# Altium PCB ife18_TS_AIL_Buck.PcbDoc
Units mm, origin at the board's own origin, x right, y up, seen from the top; angles counter-clockwise.
Board outline 25 x 19.5 mm, 2 copper layers (Top Layer, Bottom Layer); 12 components, 12 nets, 42 pads, 8 vias.
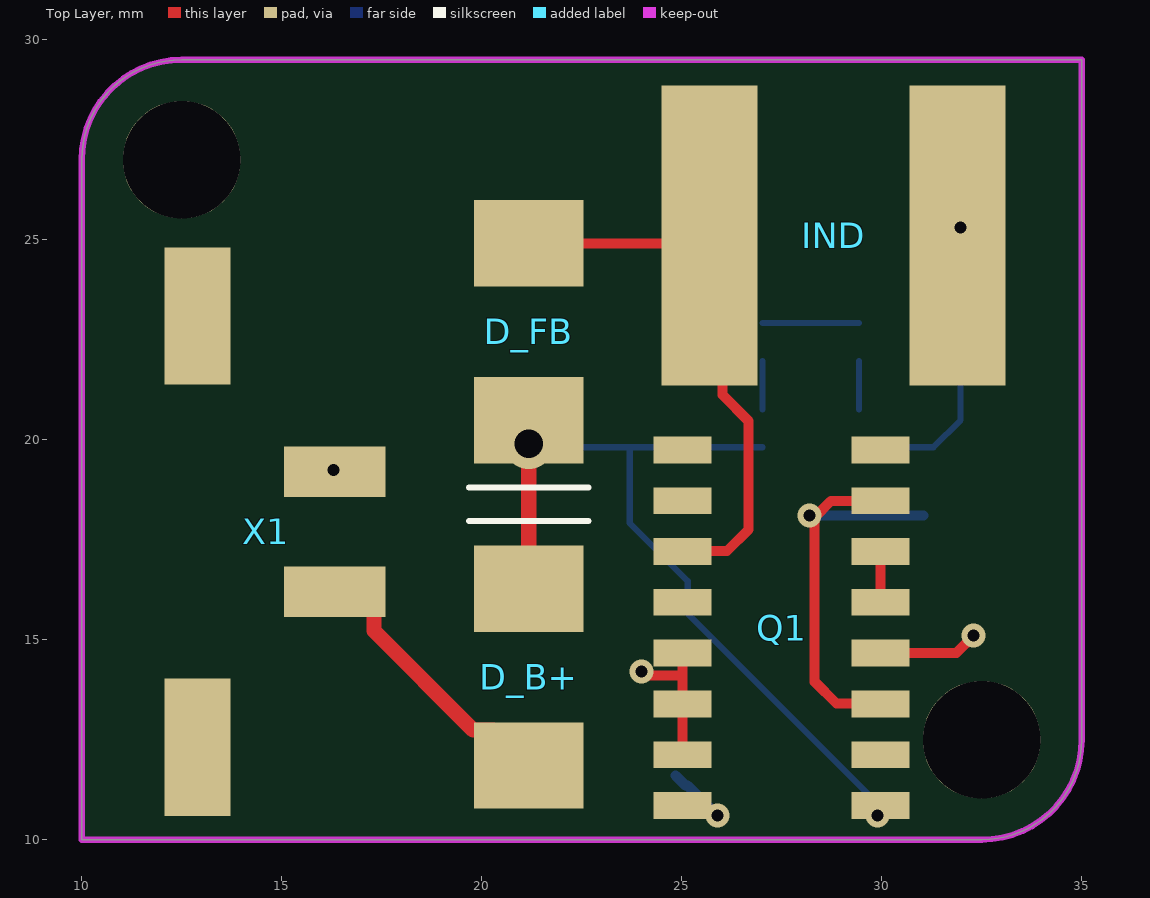
[diagram p0: Top Layer view]
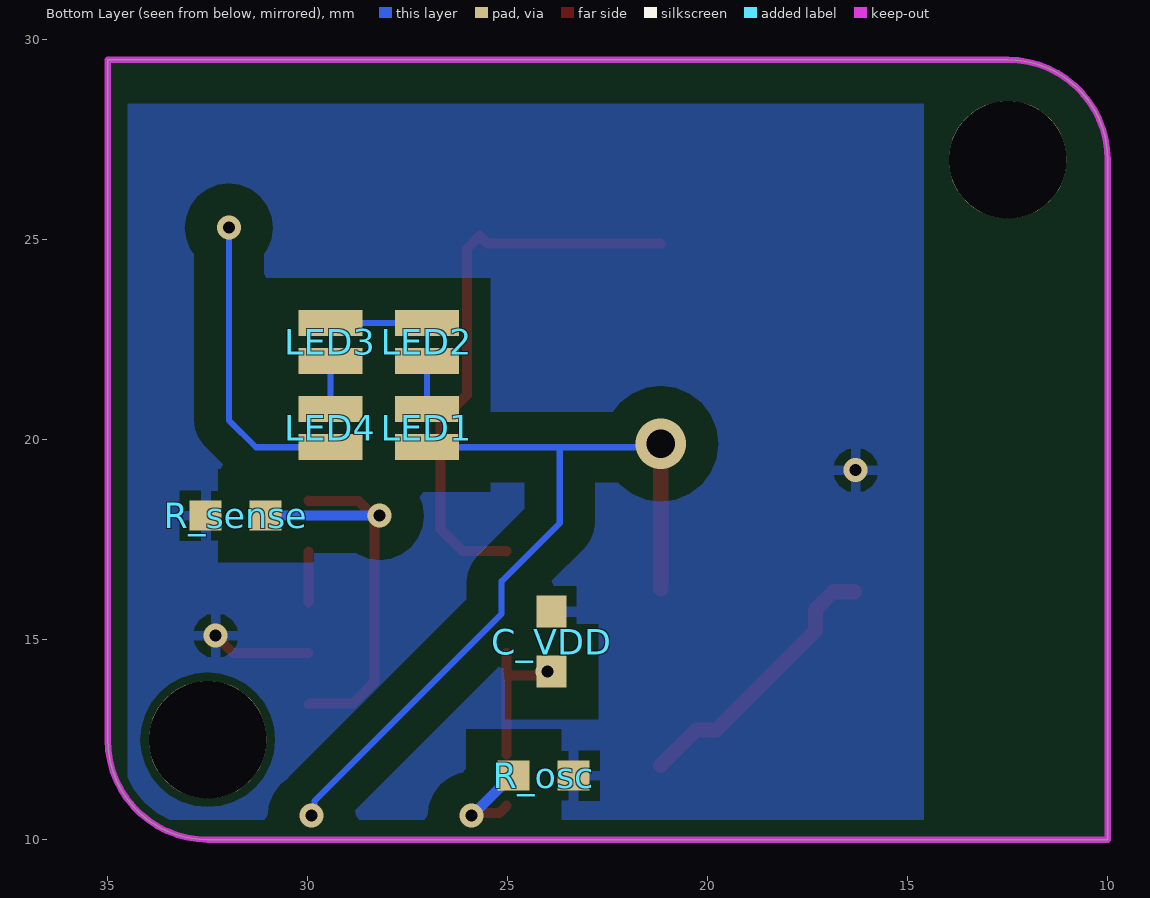
[diagram p1: Bottom Layer view, seen from below]
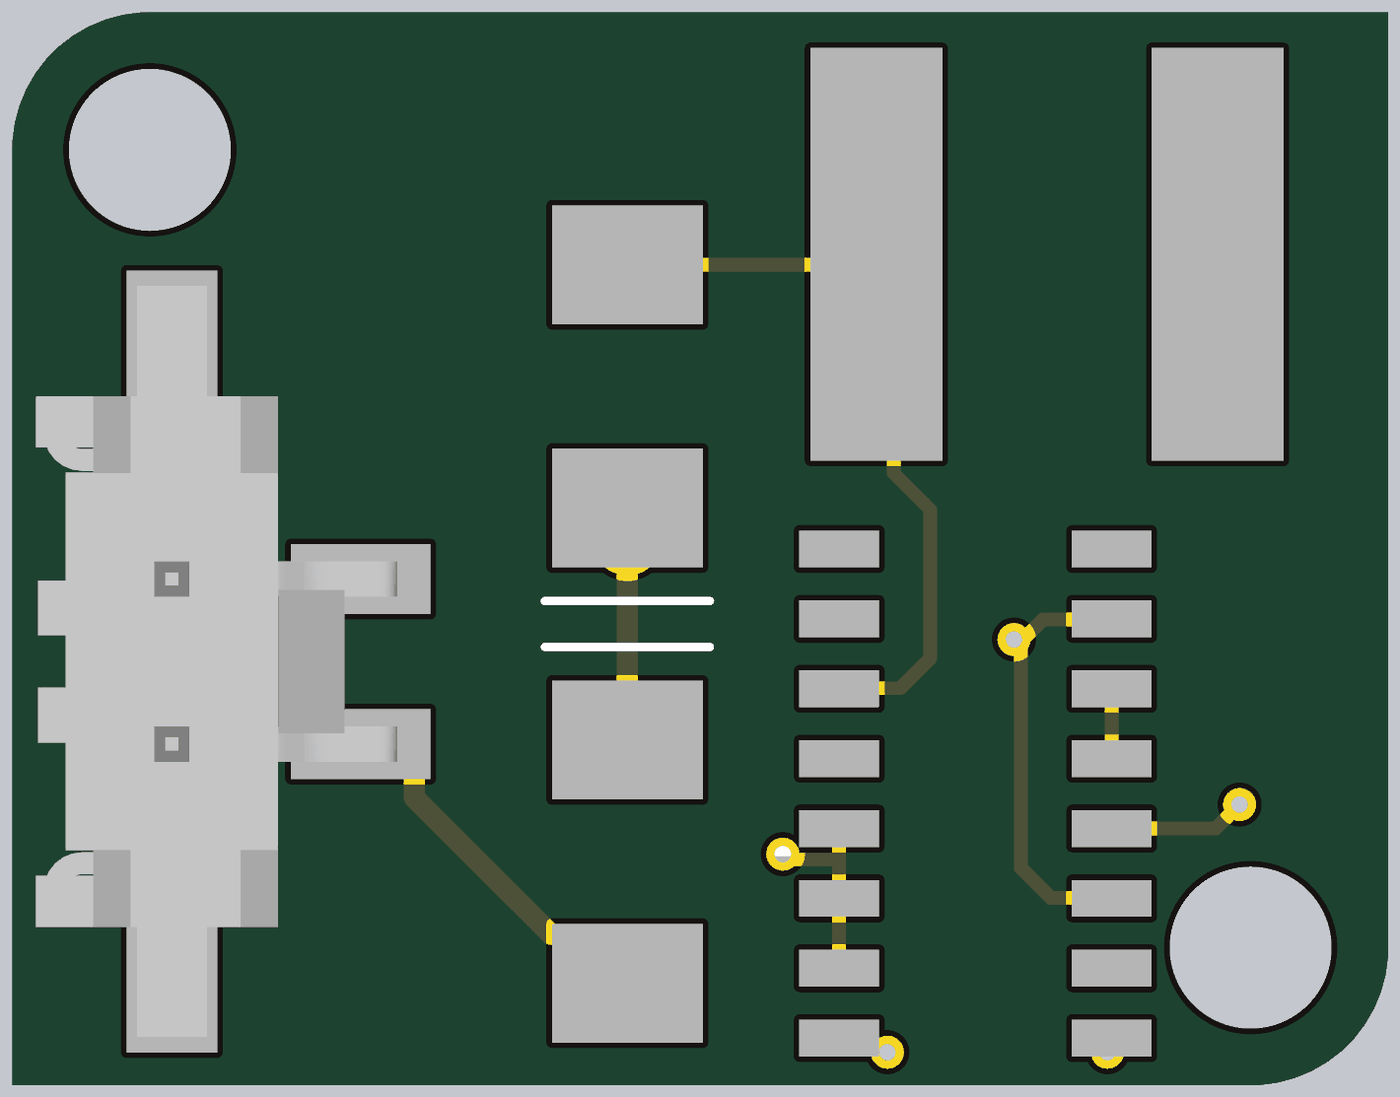
[diagram p2: 3D render of the assembled board from above, using the file's embedded part models]

## Layer stack, top to bottom
Top Solder: solder mask 0.0102, Solder Resist, Dk 3.5
Top Layer: signal copper 0.0356
Dielectric 1: dielectric 0.32, FR-4, Dk 4.8
Bottom Layer: signal copper 0.0356
Bottom Solder: solder mask 0.0102, Solder Resist, Dk 3.5

## Board outline
10,10 10,27 cw(c12.5,27) 12.5,29.5 35,29.5 35,12.5 cw(c32.5,12.5) 32.5,10

## Design rules (kind name [scope] priority, off if disabled: settings)
BoardOutlineClearance [All] p1: gap=0.2 ignorepadtopadclearanceinfootprint=FALSE
Clearance "Board Clearance" [(IsPad OR OnLayer('Keep-Out Layer'))] p1: gap=0.2 ignorepadtopadclearanceinfootprint=TRUE
Clearance [All] p2: gap=0.8 ignorepadtopadclearanceinfootprint=TRUE
PolygonConnect "Inductor Plane" [InNet('NetD_FB_A')] p1: connectstyle=Direct reliefconductorwidth=0.254 reliefentries=4 polygonreliefangle="90 Angle" airgapwidth=0.254
PolygonConnect Polygons [All] p2: connectstyle=Relief reliefconductorwidth=0.254 reliefentries=4 polygonreliefangle="90 Angle" airgapwidth=0.254
RoomDefinition ife18_TS_AIL_Buck [InComponentClass('ife18_TS_AIL_Buck')] p1: confinementstyle=ConfineIn formatcopy=TRUE lockcomponents=FALSE outline 0,0 50.8,0 50.8,40.5 0,40.5
RoutingVias [All] p1: holewidth=0.3 width=0.6 viastyle="Through Hole" minholewidth=0.3 minwidth=0.6 maxholewidth=6.3 maxwidth=10
SolderMaskExpansion [All] p1: expansion=0.102
Width [All] p1: maxlimit=0.5 minlimit=0.152 preferedwidth=0.25
30 further rules are at their usual default settings.

## Classes and differential pairs
component class ife18_TS_AIL_Buck: D_B+ D_FB IND LED1 LED2 LED3 LED4 R_sense X1

## Components (designator, comment, footprint, x,y, rotation, side; value= is the part's Value field where it differs from the comment)
C_VDD "1u" CAP-0603 23.9,14.95 r270 bottom
D_B+ "40V" SMB 21.176,14.064 r270 top
D_FB "?" SMB 21.176,22.7 r90 top
IND "2.2mH" IND-8080 28.8,25.1 r180 top
LED1 "LED XQA Red" LED_XQARED 27.018,20.287 r90 bottom
LED2 "LED XQA Red" LED_XQARED 27.018,22.446 r90 bottom
LED3 "LED XQA Red" LED_XQARED 29.431,22.446 r270 bottom
LED4 "LED XQA Red" LED_XQARED 29.431,20.287 r270 bottom
Q1 "?" SO-16 27.5,15.3 r270 top
R_osc "1M" RES-0603 24.1,11.6 r180 bottom
R_sense "2" RES-0603 31.8,18.1 r180 bottom
X1 "Molex - Micro-Fit 3.0 Series connector,  3.00mm (0.118\") pitch header, 2 positions." 43650-0224 12.9,17.7 r270 top

## Footprints (in the part's own frame and the unit in brackets; to place one, negate y for a bottom-side part, rotate by r counter-clockwise, add the part's x,y. Pads: shape width x height; smd on the part's side, far side on the other; paste and mask are expansions set on the pad)
43650-0224 [mm]
  rect 1.27x2.54 smd: P$1(1.5,3.43) P$2(-1.5,3.43)
  rect 3.43x1.65 smd: TAB1(5.39,0) TAB2(-5.39,0)
  body extent -6.82,-2.47 6.83,4.1, height 9.95
CAP-0603 [mm]
  rect 0.8x0.75 smd: 1(-0.75,0) 2(0.75,0)
  body extent -0.8,-0.4 0.8,0.42, height 0.81
IND-8080 [mm]
  rect 2.4x7.5 smd: 1(-3.1,0) 2(3.1,0)
LED_XQARED [mm]
  rect 0.65x1.6 smd: A(-0.475,0) K(0.475,0)
RES-0603 [mm]
  rect 0.8x0.75 smd: 1(-0.75,0) 2(0.75,0)
  body extent -0.8,-0.4 0.8,0.4, height 0.44
SMB [mm]
  rect 2.159x2.743 smd: A(2.21,0) K(-2.21,0)
  silkscreen extent -3.9,-1.5 -3.9,1.5, body extent -2.79,-1.97 2.8,1.97, height 2.5
SO-16 [mm]
  rect 0.67x1.45 smd: 1(-4.445,-2.475) 2(-3.175,-2.475) 3(-1.905,-2.475) 4(-0.635,-2.475) 5(0.635,-2.475) 6(1.905,-2.475) 7(3.175,-2.475) 8(4.445,-2.475) 9(4.445,2.475) 10(3.175,2.475) 11(1.905,2.475) 12(0.635,2.475) 13(-0.635,2.475) 14(-1.905,2.475) 15(-3.175,2.475) 16(-4.445,2.475)
  body extent -4.98,-3.07 4.99,3.07, height 1.78

## Part data
C_VDD: library part CAP-0603
D_B+ D_FB: library part DIODE-SMB
IND: library part IND-8080
LED1 LED2 LED3 LED4: library part LED_XQARED
Q1: library part IC-SO16_AL9901_1
R_osc R_sense: library part RES-0603
X1: library part POS2_MF43650-0224, Package=43650-0224, DeviceName=43650-0224, DeviceSetName=HEADER_POS2_?, GateName_1=G$1, LibraryName="MOLEX Micro-Fit", SymbolName_1=HEADER_POS2

## Free pads (board coordinates)
  round 2.946 hole 2.946 unplated: H1(12.5,27) H2(32.5,12.5)

## Via types
v1: diameter 0.6, hole 0.3, Top Layer to Bottom Layer, 7 vias
v2: diameter 1.27, hole 0.711, Top Layer to Bottom Layer, 1 vias

## Nets (pads, with @x,y where several pads share a name; then routed paths per layer and width w, separated by ;. In a path a pad name is that pad's centre, name@x,y a point inside that pad or via, vN(x,y) a via of type N, cw(c..) or ccw(c..) an arc to the next point about the centre after c; other vN are vias at no path point)
GND: C_VDD.1 Q1.12 R_osc.2 R_sense.1 X1.P$2 | length 2.5
  Top Layer w0.25: Q1.12 31.865,14.665 v1(32.3,15.1)
  other v1: 16.3,19.237
NetC_VDD_2: C_VDD.2 Q1.5 Q1.6 Q1.7 | length 3.6
  Top Layer w0.25: v1(24,14.2) 24.1,14.1 25.025,14.1 ; Q1.7 Q1.6 25.025,14.1 ; Q1.5 25.025,14.1
NetD_B+_A: D_B+.A X1.P$1 | length 7
  Top Layer w0.381: X1.P$1 16.861,16.2 17.306,15.755 17.306,15.224 19.787,12.743 20.287,12.743 D_B+.A
NetD_B+_K: D_B+.K D_FB.K LED1.A Q1.9 | length 21.3
  Top Layer w0.381: D_B+.K v2(21.176,19.9)
  Bottom Layer w0.152: v2(21.176,19.9) 21.264,19.812 23.7,19.812 ; LED1.A 23.7,19.812 ; v1(29.9,10.6) 29.829,10.671 29.829,10.971 25.151,15.649 25.151,16.463 23.7,17.914 23.7,19.812
NetD_FB_A: D_FB.A IND.2 Q1.3 | length 14.2
  Top Layer w0.25: D_FB.A 25.51,24.91 IND.2 26.017,24.783 26.017,21.121 26.675,20.463 26.675,17.757 26.133,17.215 25.035,17.215 Q1.3
NetIND_1: IND.1 LED4.K | length 7.6
  Bottom Layer w0.152: LED4.K 31.293,19.812 31.971,20.49 v1(31.971,25.3)
NetLED1_K: LED1.K LED2.A | length 1.2
  Bottom Layer w0.152: LED1.K LED2.A
NetLED2_K: LED2.K LED3.A | length 2.4
  Bottom Layer w0.152: LED2.K LED3.A
NetLED3_K: LED3.K LED4.A | length 1.2
  Bottom Layer w0.152: LED4.A LED3.K
NetQ1_8: Q1.8 R_osc.1 | length 2.4
  Top Layer w0.25: Q1.8 25.213,10.667 25.833,10.667 v1(25.9,10.6)
  Bottom Layer w0.25: R_osc.1 25.1,11.35 25.15,11.35 v1(25.9,10.6)
NetQ1_11: Q1.11 Q1.15 R_sense.2 | length 10.8
  Top Layer w0.25: v1(28.2,18.1) 28.287,18.1 v1@28.325,18.062 ; Q1.11 29.965,13.405 28.867,13.405 28.325,13.947 v1@28.325,18.062 ; Q1.15@29.985,18.485 Q1.15 29.965,18.465 28.728,18.465 v1@28.325,18.062
  Bottom Layer w0.25: v1(28.2,18.1) R_sense.2
NetQ1_13: Q1.13 Q1.14 | length 1.3
  Top Layer w0.25: Q1.13 Q1.14
pads on no net: Q1.1 Q1.2 Q1.4 Q1.10 Q1.16 X1.TAB1 X1.TAB2

## Polygon pours and split planes (outlines as drawn)
GND on Bottom Layer "Bottom Layer-No Net" (solid, pour order 2): 14.6,28.4 34.5,28.4 34.5,10.5 14.6,10.5

## Keep-outs
Keep-Out Layer:
  the board outline again, w0.152